# Altium PCB NBP-28 Pin_Swap_Example.PcbDoc (part 3 of 4)
Units mil, origin at the board's own origin, x right, y up, seen from the top; angles counter-clockwise.
Board outline 2716.54 x 3916.86 mil, 10 copper layers (Top Layer, Mid-Layer 1, VCC1V2, Mid-Layer 2, VCC, GND, MidLayer4, VCCINT, Mid-Layer 3, Bottom Layer), stack 81 mil thick; 230 components, 429 nets, 1587 pads, 770 vias.
Unrouted connection lines stored in the file: 563.
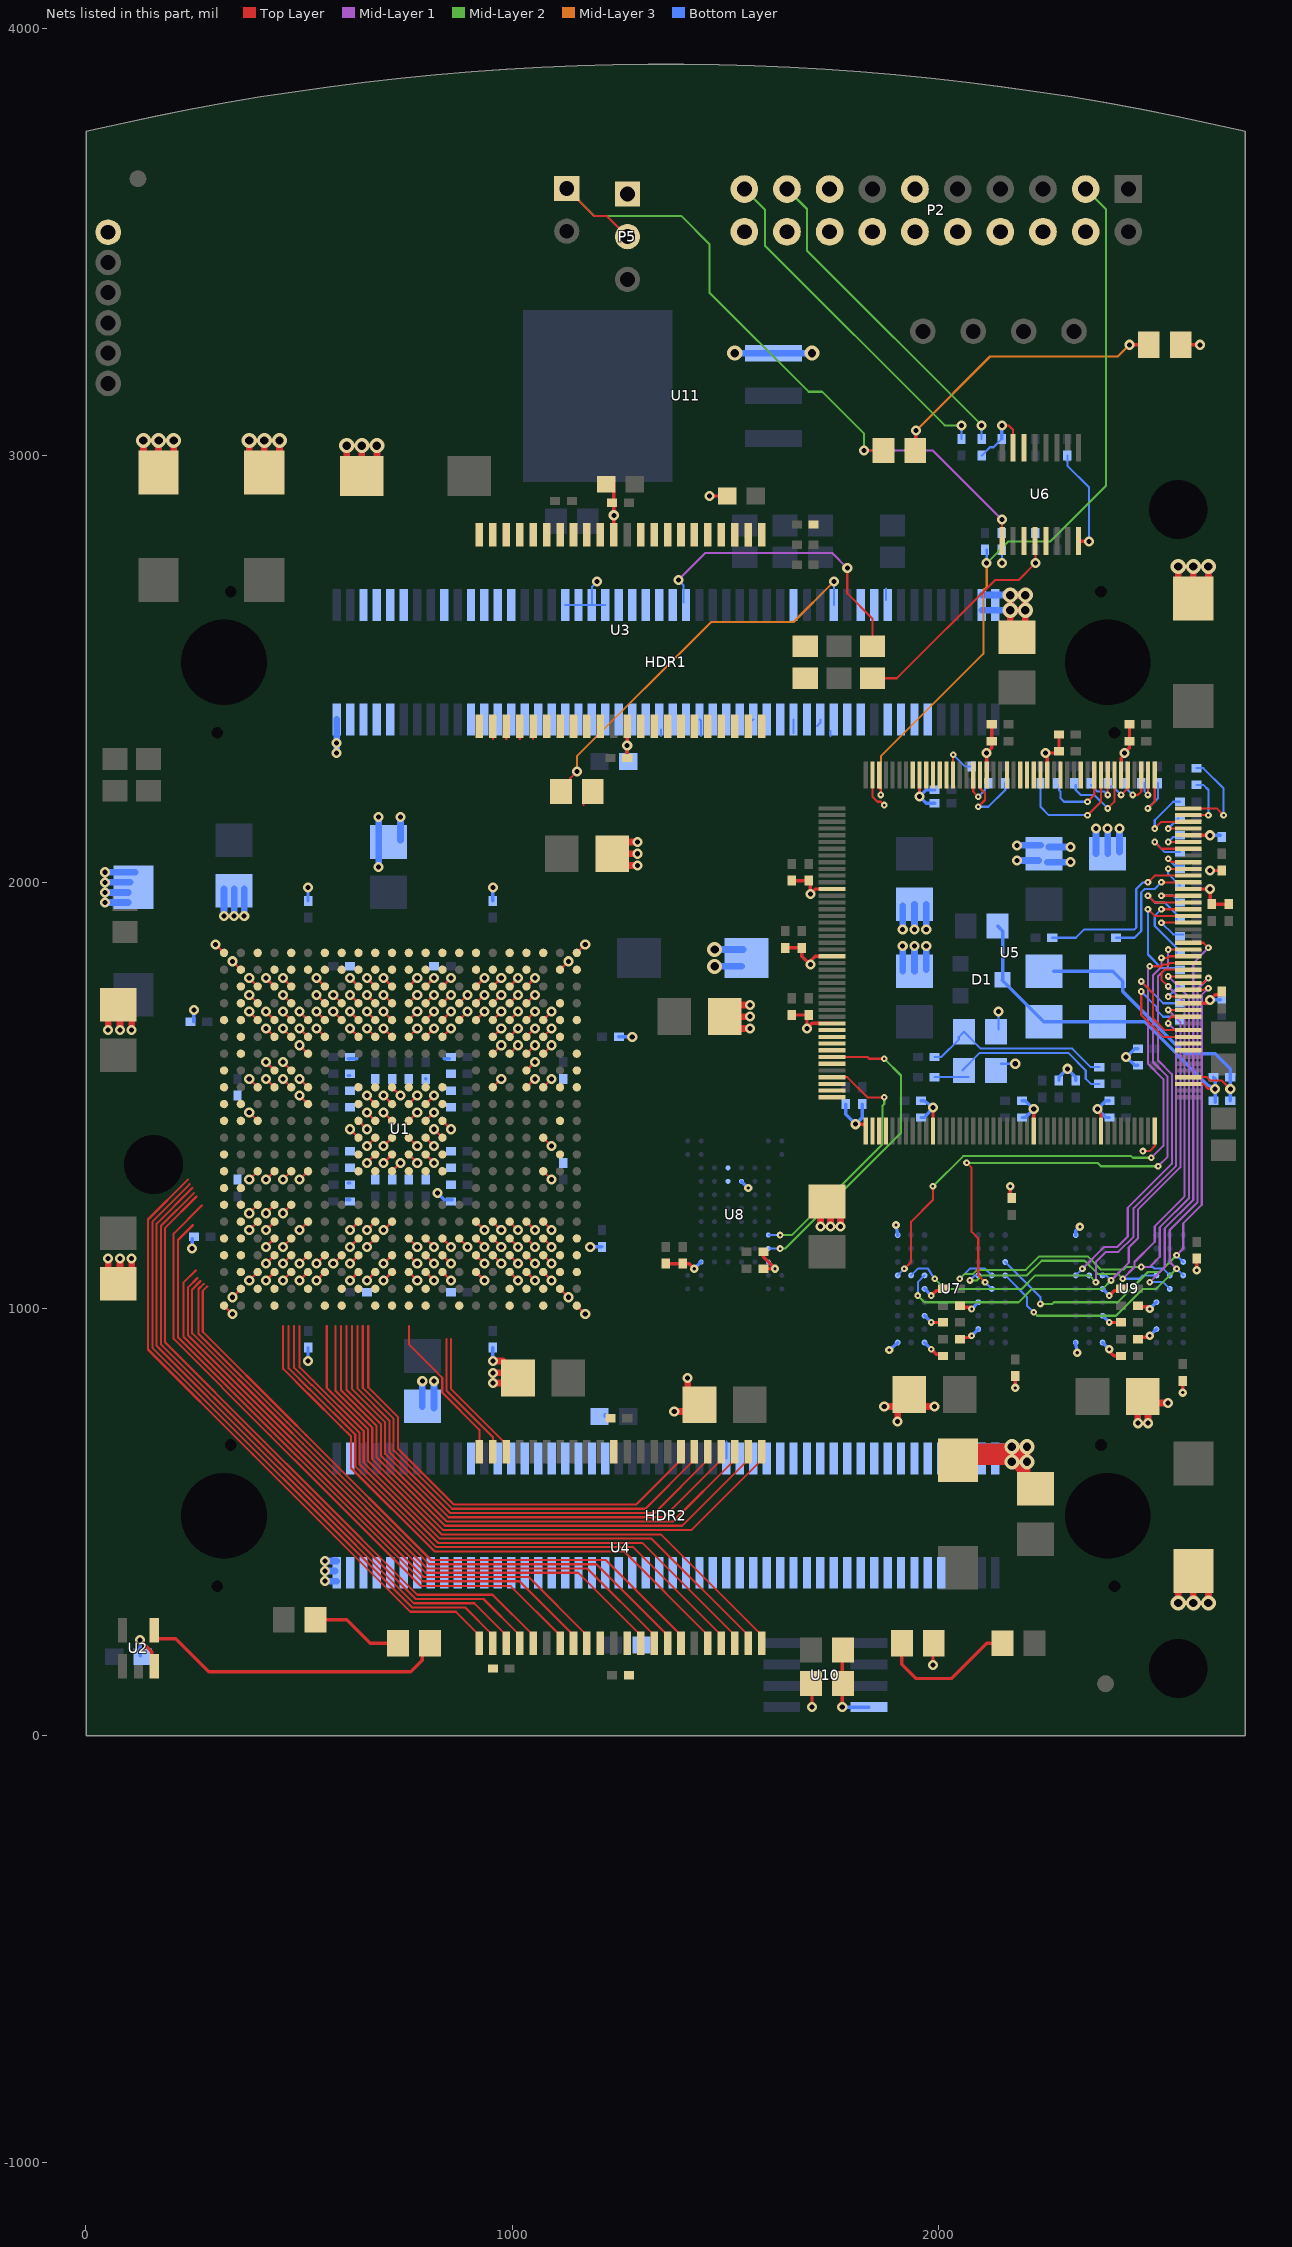
[diagram p9: the nets of this part, all layers, seen from the top]

## Via types
v1: diameter 23.62, hole 11.81, Top Layer to Bottom Layer, 495 vias
v2: diameter 78.74, hole 47.24, Top Layer to Bottom Layer, 101 vias
v3: diameter 15.75, hole 5.91, Top Layer to Bottom Layer, 92 vias
v4: diameter 35.43, hole 19.68, Top Layer to Bottom Layer, 59 vias
v5: diameter 19.68, hole 7.87, Top Layer to Bottom Layer, 23 vias

## Nets (pads, with @x,y where several pads share a name; then routed paths per layer and width w, separated by ;. In a path a pad name is that pad's centre, name@x,y a point inside that pad or via, vN(x,y) a via of type N, cw(c..) or ccw(c..) an arc to the next point about the centre after c; other vN are vias at no path point) (continued)
FPGA_TDO: HDR1.54 R6.2 | length 702.1
  Top Layer w5: v1(1785.15,2735.92) 1785.15,2676.87 1844.2,2617.81 R6.2@1844.2,2552.85
  Mid-Layer 1 w5: v1(1389.3,2708.31) 1452.34,2771.36 1749.71,2771.36 v1(1785.15,2735.92)
  Bottom Layer w5: v1(1389.3,2708.31) 1401.3,2696.31 HDR1.54@1401.3,2655.31
FPGA_TMS: HDR1.70 R13.1 U6.14
FPGA_TMSP: R13.2 U1.A20
GND: C1.1 C2.2 C3.2 C4.2 C5.2 C6.2 C7.2 C8.2 C9.2 C10.2 C11.2 C12.2 C13.2 C14.2 C15.2 C16.2 C17.2 C18.2 C19.2 C20.2 C21.2 C22.2 C23.2 C24.2 C25.2 C26.2 C27.2 C28.2 C29.2 C30.2 C31.2 C32.2 C33.2 C34.2 C35.2 C36.2 C37.2 C38.2 C39.2 C40.2 C41.2 C42.2 C43.2 C44.2 C45.2 C46.2 C47.2 C48.2 C49.2 C50.2 C51.2 C52.2 C53.2 C54.2 C55.2 C56.2 C57.2 C58.2 C62.2 C66.2 C67.2 C68.2 C69.2 C70.2 C71.2 C72.2 C73.2 C74.2 C75.2 C76.2 C77.2 C78.2 C79.2 C80.2 C81.2 C82.2 C83.2 C84.2 C85.2 C86.2 C87.2 C88.2 C89.2 C90.2 C91.2 C92.2 C93.2 C94.2 C95.2 C96.2 C97.2 C98.2 C99.2 C100.2 C101.2 C102.2 C103.2 C104.2 C105.2 C106.2 C107.2 C108.2 C109.2 C110.2 C111.2 C112.2 C113.2 C114.2 C115.2 C116.2 C117.2 C118.2 C119.2 C120.2 C121.2 C122.2 C123.2 C124.2 C125.2 C126.2 C127.2 C128.2 C129.2 C130.2 C131.2 C132.2 C133.2 HDR1.1 HDR1.36 HDR1.38 HDR1.40 HDR1.42 HDR1.98 HDR1.100 HDR2.1 HDR2.98 HDR2.100 LED1.2 LED3.2 P2.4 P2.6 P2.8 P2.10 P2.11 P2.12 P2.14 P2.16 P2.18 P2.20 P5.1 R37.1 R46.1 R60.2 R63.1 R65.2 R66.1 TP10.1 U1.A1 U1.A22 U1.AA2 U1.AA21 U1.AB1 U1.AB22 U1.B2 U1.B21 U1.C9 U1.C14 U1.J3 U1.J9 U1.J10 U1.J11 U1.J12 U1.J13 U1.J14 U1.J20 U1.K9 U1.K10 U1.K11 U1.K12 U1.K13 U1.K14 U1.L9 U1.L10 U1.L11 U1.L12 U1.L13 U1.L14 U1.M9 U1.M10 U1.M11 U1.M12 U1.M13 U1.M14 U1.N9 U1.N10 U1.N11 U1.N12 U1.N13 U1.N14 U1.P3 U1.P9 U1.P10 U1.P11 U1.P12 U1.P13 U1.P14 U1.P20 U1.Y9 U1.Y14 U2.3 U3.12 U3.34 U4.12 U4.34 U5.13 U5.23 U5.33 U5.45 U5.55 U5.70 U5.80 U5.88 U5.103 U5.120 U5.128 U5.138 U5.149 U5.158 U5.168 U5.175 U6.8 U6.15 U7.A1 U7.A3 U7.B7 U7.C3 U7.D7 U7.E3 U7.J1 U8.D4 U8.K2 U8.K7 U9.A1 U9.A3 U9.B7 U9.C3 U9.D7 U9.E3 U9.J1 U11.1 | length 11663.4
  Top Layer w5: v1(304.83,1854.04) U1.A1@324.52,1834.35 ; U1.AB1@324.52,1007.58 v1(344.2,987.89) ; v1(344.2,1027.26) U1.AA2@363.89,1046.95 ; v1(344.2,1814.67) U1.B2@363.89,1794.98 ; v1(383.57,1302.85) U1.P3@403.26,1322.54 ; v1(383.57,1539.08) U1.J3@403.26,1519.39 ; v1(619.79,1066.63) U1.Y9@639.48,1086.32 ; v1(619.79,1420.97) U1.M9@639.48,1401.28 ; v1(619.79,1775.3) U1.C9@639.48,1755.61 ; U1.L9@639.48,1440.65 v1(659.16,1420.96) ; v1(659.16,1342.22) U1.N10@678.85,1361.91 ; v1(659.16,1381.59) U1.M10@678.85,1401.28 ; v1(659.16,1460.34) U1.L10@678.85,1440.65 ; v1(659.16,1499.71) U1.K10@678.85,1480.02 ; v1(698.53,1342.22) U1.N11@718.22,1361.91 ; v1(698.53,1381.59) U1.M11@718.22,1401.28 ; v1(698.53,1460.34) U1.L11@718.22,1440.65 ; v1(698.53,1499.71) U1.K11@718.22,1480.02 ; U1.P11@718.22,1322.54 v1(737.9,1342.23) ; U1.J11@718.22,1519.39 v1(737.9,1499.7) ; U1.N12@757.59,1361.91 v1(777.27,1342.22) ; U1.M12@757.59,1401.28 v1(777.27,1381.59) ; U1.L12@757.59,1440.65 v1(777.27,1460.34) ; U1.K12@757.59,1480.02 v1(777.27,1499.71) ; U1.N13@796.96,1361.91 v1(816.64,1342.22) ; U1.M13@796.96,1401.28 v1(816.64,1381.59) ; U1.L13@796.96,1440.65 v1(816.64,1460.34) ; U1.K13@796.96,1480.02 v1(816.64,1499.71) ; v1(816.64,1420.97) U1.M14@836.33,1401.28 ; U1.Y14@836.33,1086.32 v1(856.01,1066.63) ; U1.L14@836.33,1440.65 v1(856.01,1420.96) ; U1.C14@836.33,1755.61 v1(856.01,1775.3) ; U1.P20@1072.55,1322.54 v1(1092.23,1302.85) ; U1.J20@1072.55,1519.39 v1(1092.23,1539.08) ; U1.AA21@1111.92,1046.95 v1(1131.6,1027.26) ; U1.B21@1111.92,1794.98 v1(1131.6,1814.67) ; U1.AB22@1151.29,1007.58 v1(1170.97,987.89) ; U1.A22@1151.29,1834.35 v1(1170.97,1854.04) ; U5.175@1844.2,2251.67 1844.2,2200.49 1856.01,2188.68 1863.89,2188.68 v3(1871.76,2180.81) ; v1(2147.35,3070.57) 2163.1,3070.57 2173.93,3059.74 U6.15@2173.93,3018.41 ; v3(2478.06,1369.78) 2493.81,1369.78 2505.62,1381.59 U5.88@2505.62,1417.03
  Top Layer w7.87: v1(127.67,224.11) 155.22,196.55 U2.3@155.22,165.06 ; U3.34@1237.9,2809.74 v1(1237.9,2859.94) 1237.9,2932.78 C51.2@1237.9,2940.65 ; C53.2@1269.4,2291.04 v1(1269.4,2320.57) U3.12@1269.4,2365.85 U3.12@1269.4,2370.77 ; C105.2@1359.95,1106 1415.07,1106 v5(1426.88,1094.19) ; v1(1462.31,2905.22) C124.2@1503.65,2905.22 ; C103.2@1588.3,1094.19 v5(1615.85,1094.19) 1588.3,1121.75 C106.2@1588.3,1133.56 ; C71.2@1639.48,1846.16 C81.2@1678.85,1846.16 1678.85,1826.48 v1(1698.53,1806.79) 1698.53,1814.67 1710.34,1826.48 U5.23@1749.71,1826.48 ; C70.2@1655.22,1688.68 C80.2@1694.59,1688.68 ; C68.2@1655.22,2003.64 C78.2@1694.59,2003.64 ; C80.2@1698.53,1684.74 1694.6,1684.74 1690.66,1684.74 v1(1690.66,1657.18) 1702.47,1669 U5.33@1749.71,1669 ; C78.2@1698.53,1999.7 v1(1698.53,1972.15) 1710.34,1983.96 U5.13@1749.71,1983.96 ; v1(1702.47,66.63) R65.2@1702.47,119.78 ; v1(1804.83,1432.78) U5.45@1828.45,1432.78 ; v1(1954.44,2200.49) U5.168@1954.44,2251.67 ; v3(1982,905.22) 1993.81,893.41 C120.2@2013.49,893.41 ; v3(1982,968.21) C118.2@2009.56,968.21 ; v3(1982,1031.2) 1993.81,1043.01 C109.2@2013.49,1043.01 ; v1(1985.93,165.06) LED1.2@1985.93,214.27 ; U5.55@1985.93,1417.03 v1(1985.93,1472.15) ; C119.2@2044.99,932.78 2072.55,932.78 v3(2076.48,936.71) ; C121.2@2044.99,1003.64 2072.55,1003.64 v3(2076.48,999.7) ; U5.158@2111.92,2251.67 v1(2111.92,2302.85) 2123.73,2314.67 C95.2@2123.73,2369.78 ; C122.2@2167.04,1263.48 v5(2167.04,1287.11) ; v5(2178.85,814.67) C108.2@2178.85,842.22 ; U5.70@2222.15,1417.03 v1(2222.15,1468.21) ; v1(2249.71,2302.85) C86.2@2277.27,2302.85 ; U5.149@2253.65,2251.67 v1@2253.65,2298.92 ; C86.2@2281.21,2306.79 C76.2@2281.21,2346.16 ; U6.8@2328.45,2798.92 v1(2352.08,2798.92) ; v1@2371.76,1464.27 2379.63,1456.4 U5.80@2379.63,1417.03 ; v5@2398.33,902.28 2410.14,890.47 C117.2@2429.82,890.47 ; v3(2399.32,968.21) C112.2@2426.88,968.21 ; v3(2399.32,1031.2) 2411.13,1043.01 C107.2@2430.82,1043.01 ; U5.138@2426.88,2251.67 2426.88,2291.04 v1@2434.75,2298.92 ; v1(2434.75,2302.85) 2446.56,2314.67 C94.2@2446.56,2369.78 ; C115.2@2461.32,933.78 2488.88,933.78 v5@2492.81,937.71 ; C116.2@2461.32,1004.64 2488.88,1004.64 v5@2492.82,1000.7 ; LED3.2@2566.64,3259.55 v1(2611.92,3259.55) ; v5(2571.56,803.85) C114.2@2571.56,831.41 ; U5.103@2584.36,1716.24 2627.67,1716.24 v1(2635.54,1724.11) 2647.35,1735.93 C84.2@2663.1,1735.93 ; U5.120@2584.36,1983.96 v1(2635.54,1983.96) C101.2@2635.54,1952.46 ; U5.128@2584.36,2109.94 v1(2635.54,2109.94) ; v5(2604.04,1090.26) C113.2@2604.04,1117.81 ; v1(2635.54,2027.26) C75.2@2663.1,2027.26 ; C101.2@2639.48,1948.52 C93.2@2678.85,1948.52
  Top Layer w15.75: C3.2@44.99,1054.82 52.86,1058.76 v1(52.86,1117.81) ; C32.2@44.99,1716.24 52.86,1712.3 v1(52.86,1653.25) ; C3.2@76.48,1054.82 80.42,1058.76 v1(80.42,1117.81) ; C32.2@76.48,1716.24 80.42,1712.3 v1(80.42,1653.25) ; C3.2@107.98,1054.82 v1(107.98,1117.81) ; v1(107.98,1653.25) C32.2@107.98,1716.24 ; C130.2@135.54,2964.27 v4(135.54,3035.14) ; C130.2@170.97,2960.33 v4(170.97,3035.14) ; C130.2@206.41,2956.4 v4(206.41,3035.14) ; C127.2@383.57,2972.15 v4(383.57,3035.14) ; C127.2@419,2960.33 v4(419,3035.14) ; C127.2@454.44,2976.08 v4(454.44,3035.14) ; C131.2@611.92,2952.46 v4(611.92,3023.33) ; C131.2@647.35,2952.46 v4(647.35,3023.33) ; C131.2@682.78,2952.46 v4(682.78,3023.33) ; v1(954.44,826.48) C2.2@1013.49,826.48 ; v1(954.44,850.1) C2.2@1017.43,850.1 ; v1(954.44,877.66) 978.06,877.66 C2.2@997.74,857.97 ; C49.2@1230.03,2039.07 v1(1293.02,2039.07) ; C49.2@1230.03,2094.19 v1(1293.02,2094.19) ; C49.2@1233.96,2066.63 v1(1293.02,2066.63) ; v1(1379.63,759.55) C50.2@1442.63,759.55 ; C50.2@1411.13,763.48 v1(1411.13,838.29) ; C31.2@1493.81,1657.18 v1(1556.8,1657.18) ; C31.2@1493.81,1712.3 v1(1556.8,1712.3) ; C31.2@1497.74,1684.74 v1(1556.8,1684.74) ; v1(1722.15,1192.62) C102.2@1722.15,1235.93 ; v1(1745.78,1192.62) C102.2@1745.78,1243.8 ; v1(1769.4,1192.62) C102.2@1769.4,1251.67 ; v1(1871.76,771.36) C110.2@1903.26,771.36 ; v1(1903.26,735.93) C110.2@1903.26,771.36 ; C110.2@1903.26,783.17 C110.2@1903.26,771.36 ; C110.2@1919,771.36 C110.2@1903.26,771.36 ; C110.2@1938.69,771.36 v1(1989.87,771.36) ; C132.2@2044.99,676.87 v4(2170.97,676.87) ; C132.2@2048.93,641.44 v4(2170.97,641.44) ; C132.2@2072.55,665.06 v4@2170.97,665.06 ; C132.2@2080.42,653.25 v4@2170.97,653.25 ; C123.2@2167.04,2566.63 v4(2167.04,2637.5) ; C123.2@2202.47,2566.63 v4(2202.47,2637.5) ; C125.2@2206.41,582.38 C125.2@2206.41,606 ; C125.2@2210.34,602.07 C125.2@2206.41,606 ; v1(2466.25,731.99) C111.2@2466.25,794.98 ; v1(2489.87,731.99) C111.2@2489.87,787.11 ; C111.2@2493.81,779.23 v1(2537.11,779.23) ; v4(2560.74,310.73) C126.2@2560.74,373.72 ; C133.2@2560.74,2676.87 v4(2560.74,2739.86) ; v4(2596.17,310.73) C126.2@2596.17,377.66 ; C133.2@2596.17,2665.06 v4(2596.17,2739.86) ; v4(2631.6,310.73) C126.2@2631.6,361.91 ; C133.2@2631.6,2661.12 v4(2631.6,2739.86) ; v4(2167.04,2637.5) v4(2202.47,2637.5) ; v4(2167.04,2637.5) v4(2167.04,2672.93) v4(2202.47,2672.93) v4(2202.47,2637.5) ; v4(2170.97,641.44) v4(2206.41,641.44) ; v4(2170.97,641.44) v4@2170.97,653.25 ; v4(2170.97,641.44) C125.2@2206.41,606 ; v4@2170.97,653.25 v4@2170.97,665.06 ; v4@2170.97,653.25 2194.59,653.25 v4(2206.41,641.44) ; v4@2170.97,665.06 v4(2170.97,676.87) ; v4@2170.97,665.06 2194.59,665.06 v4(2206.41,676.87) ; v4(2170.97,676.87) v4(2206.41,676.87) ; C125.2@2206.41,606 v4(2206.41,641.44) ; v4(2206.41,641.44) v4(2206.41,676.87)
  Bottom Layer w5: HDR1.36@1123.73,2649.31 HDR1.38@1155.22,2649.31 HDR1.40@1186.72,2649.31 ; v1(1198.53,2704.43) 1186.72,2692.62 HDR1.40@1186.72,2649.31 ; HDR1.42@1218.22,2649.31 HDR1.40@1186.72,2649.31 ; R66.1@2100.11,2999.7 2119.79,3019.39 2127.67,3019.39 C62.2@2147.35,3039.07 ; R37.1@2139.48,1655.22 v1(2139.48,1696.55) ; R46.1@2145.38,1574.51 v1(2178.85,1574.51) ; v1(2147.35,2747.74) R60.2@2147.35,2779.23 ; R63.1@2300.89,2999.7 2300.89,2976.08 2352.08,2924.9 v1(2352.08,2798.92)
  Bottom Layer w7.87: C1.1@127.67,186.71 v1(127.67,224.11) ; v1(249.71,1141.44) C11.2@249.71,1165.06 ; C9.2@253.65,1672.93 v1(253.65,1700.49) ; v1(521.37,877.66) C10.2@521.37,909.15 ; C4.2@521.37,1956.4 v1(521.37,1987.89) ; C24.2@611.92,1255.61 C24.2@619.79,1255.61 ; C20.2@615.85,1294.98 C20.2@619.79,1294.98 ; C21.2@615.85,1546.95 C21.2@619.79,1546.95 ; C22.2@615.85,1586.32 635.54,1586.32 ; v1(824.52,1271.36) 840.26,1255.61 C26.2@859.95,1255.61 ; 840.26,1586.32 C28.2@852.08,1586.32 ; v1(954.44,877.66) C5.2@954.44,909.15 ; C8.2@954.44,1956.4 v1(954.44,1987.89) ; v1(1182.78,1145.37) C7.2@1210.34,1145.37 ; C56.2@1218.22,747.74 C56.2@1218.22,751.67 ; C6.2@1249.71,1637.5 v1(1281.21,1637.5) ; C52.2@1269.4,2285.14 v1(1269.4,2320.57) ; v5(1426.88,1094.19) U8.K7@1442.63,1109.94 ; U8.D4@1537.11,1298.92 v5(1552.86,1283.17) ; U8.K2@1600.11,1109.94 v5(1615.85,1094.19) ; C97.2@1781.21,1480.02 1781.21,1456.4 v1(1804.83,1432.78) 1820.58,1448.52 C92.2@1820.58,1480.02 ; v5(1883.36,903.59) U7.A1@1903.26,920.96 ; v5(1899.32,1196.55) U7.J1@1903.26,1172.93 ; C79.2@1958.37,1448.52 1966.25,1448.52 v1(1985.93,1472.15) 1966.25,1487.89 C69.2@1958.37,1487.89 ; U7.A3@1966.25,920.96 v3(1982,905.22) ; U7.C3@1966.25,983.96 v3(1982,968.21) ; U7.E3@1966.25,1046.95 v3(1982,1031.2) ; C87.2@1989.87,2184.74 1970.19,2184.74 v1(1954.44,2200.49) 1970.19,2216.24 C77.2@1989.87,2216.24 ; v3(2076.48,936.71) U7.B7@2092.23,952.46 ; v3(2076.48,999.7) U7.D7@2092.23,1015.45 ; C62.2@2147.35,3039.07 v1(2147.35,3070.57) ; C83.2@2194.59,1448.52 2202.47,1448.52 v1(2222.15,1468.21) 2202.47,1487.89 C73.2@2194.59,1487.89 ; C98.2@2281.21,1535.14 2281.21,1543.01 v1(2300.89,1562.7) 2320.58,1543.01 C91.2@2320.58,1535.14 ; U9.A1@2319.59,921.96 2319.59,920.96 2319.63,920.77 v5(2324.52,897.34) ; U9.J1@2320.58,1172.93 2320.58,1182.78 v5(2330.42,1192.62) ; U9.A3@2383.57,920.96 v5(2399.32,905.22) ; U9.C3@2383.57,983.96 v3(2399.32,968.21) ; U9.E3@2383.57,1046.95 v3(2399.32,1031.2) ; C82.2@2399.32,1448.52 2391.45,1448.52 v1(2371.76,1468.21) 2391.45,1487.89 C72.2@2399.32,1487.89 ; C99.2@2466.25,1570.57 2458.37,1570.57 v1(2438.69,1590.26) 2458.37,1609.94 C90.2@2466.25,1609.94 ; v5(2493.81,936.71) U9.B7@2509.56,952.46 ; v5(2493.81,999.7) U9.D7@2509.56,1015.45 ; v1(2635.54,1724.11) C74.2@2659.16,1724.11 ; v1(2635.54,2109.94) C85.2@2659.16,2109.94
  Bottom Layer w15.75: v1(44.99,1952.46) C128.2@100.11,1952.46 ; v1(44.99,1976.08) C128.2@100.11,1976.08 ; v1(44.99,1999.7) C128.2@104.04,1999.7 ; v1(44.99,2023.33) C128.2@115.85,2023.33 ; v1(324.52,1920.96) C30.2@324.52,1983.96 ; v1(348.14,1920.96) C30.2@348.14,1980.02 C30.2@348.14,1983.96 ; v1(371.76,1920.96) C30.2@371.76,1983.96 ; v1(560.74,361.91) HDR2.1@588.3,361.91 ; v1(560.74,385.53) HDR2.1@584.36,385.53 ; v1(560.74,409.15) HDR2.1@588.3,409.15 ; v1(588.3,2302.85) v1(588.3,2326.48) HDR1.1@588.29,2381.59 ; v1(686.72,2035.14) v1(686.72,2153.25) ; C17.2@737.9,2098.13 v1(737.9,2153.25) ; C16.2@789.08,771.36 v1(789.08,830.41) ; C16.2@816.64,767.42 v1(816.64,830.41) ; v4(1474.12,1802.85) C129.2@1537.11,1802.85 ; v4(1474.12,1842.22) C129.2@1541.05,1842.22 ; v4(1521.37,3239.86) U11.1@1611.92,3239.86 v4(1702.47,3239.86) ; C88.2@1915.07,1791.04 v1(1915.07,1850.1) ; v1(1915.07,1889.47) C67.2@1915.07,1944.59 ; C88.2@1942.63,1791.04 v1(1942.63,1850.1) ; v1(1942.63,1889.47) C67.2@1942.63,1948.52 ; C88.2@1970.19,1794.98 v1(1970.19,1850.1) ; v1(1970.19,1889.47) C67.2@1970.19,1948.52 ; HDR2.98@2100.11,641.44 v4(2170.97,641.44) v4(2206.41,641.44) ; HDR2.98@2100.11,676.87 2131.6,676.87 v4(2170.97,676.87) v4(2206.41,676.87) ; HDR1.98@2100.11,2637.5 v4(2167.04,2637.5) ; HDR1.98@2100.11,2672.93 v4(2167.04,2672.93) ; v1(2182.78,2050.89) C89.2@2233.96,2050.89 ; v1(2182.78,2086.32) C89.2@2237.9,2086.32 ; C89.2@2253.65,2046.95 v1(2308.77,2046.95) ; C89.2@2257.59,2082.38 v1(2308.77,2082.38) ; C66.2@2367.82,2066.63 v1(2367.82,2125.69) ; C66.2@2395.38,2066.63 v1(2395.38,2125.69) ; C66.2@2422.94,2070.57 v1(2422.94,2125.69) ; v4(2167.04,2637.5) v4(2202.47,2637.5) v4(2202.47,2672.93) v4(2167.04,2672.93) ; v4(2167.04,2637.5) v4(2167.04,2672.93)
GREEN0: HDR1.10 U1.A3
GREEN1: HDR1.12 U1.D3 | length 27.8
  Top Layer w5: v1(383.57,1735.93) U1.D3@403.26,1716.24
HDRIVE: HDR1.18 U1.B4
INT0: U1.F19 U5.155 | length 27.8
  Top Layer w5: U1.F19@1033.18,1637.5 v1(1052.86,1657.19)
INT1: U1.E21 U5.153
INT2: U1.F20 U5.152 | length 27.8
  Top Layer w5: U1.F20@1072.55,1637.5 v1(1092.23,1657.19)
INT3: U1.E22 U5.151
INT4: U1.F21 U5.150
IO0: HDR2.7 U1.W2
IO1: HDR2.9 U1.AB4
IO2: HDR2.11 U1.T3 | length 27.8
  Top Layer w5: v1(383.57,1224.11) U1.T3@403.26,1243.8
IO3: HDR2.13 U1.Y5 | length 27.8
  Top Layer w5: v1(462.31,1066.63) U1.Y5@482,1086.32
IO4: HDR2.15 U1.W4 | length 27.8
  Top Layer w5: v1(422.94,1106) U1.W4@442.63,1125.69
IO5: HDR2.17 U1.V5 | length 27.8
  Top Layer w5: v1(462.31,1145.37) U1.V5@482,1165.06
IO6: HDR2.19 U1.T4 | length 27.8
  Top Layer w5: v1(422.94,1224.11) U1.T4@442.63,1243.8
IO7: HDR2.21 U1.V4 | length 27.8
  Top Layer w5: v1(422.94,1145.37) U1.V4@442.63,1165.06
IO8: HDR2.23 U1.Y6 | length 27.8
  Top Layer w5: v1(501.68,1066.63) U1.Y6@521.37,1086.32
IO9: HDR2.25 U1.Y7 | length 27.8
  Top Layer w5: v1(541.05,1066.63) U1.Y7@560.74,1086.32
IO10: HDR2.27 U1.P5 | length 27.8
  Top Layer w5: v1(462.31,1302.85) U1.P5@482,1322.54
IO11: HDR2.29 U1.W7 | length 27.8
  Top Layer w5: v1(541.05,1106) U1.W7@560.74,1125.69
IO12: HDR2.31 U1.U6 | length 27.8
  Top Layer w5: v1(501.68,1184.74) U1.U6@521.37,1204.43
IO13: HDR2.33 U1.AA8
IO14: HDR2.35 U1.W8 | length 27.8
  Top Layer w5: v1(580.42,1106) U1.W8@600.11,1125.69
IO15: HDR2.37 U1.AB11
IO16: HDR2.39 U1.AB10
IO17: HDR2.41 U1.Y11 | length 27.8
  Top Layer w5: v1(698.53,1066.63) U1.Y11@718.22,1086.32
IO18: HDR2.43 U1.U9 | length 27.8
  Top Layer w5: v1(619.79,1184.74) U1.U9@639.48,1204.43
IO19: HDR2.45 U1.P6 | length 27.8
  Top Layer w5: v1(501.68,1302.85) U1.P6@521.37,1322.54
IO20: HDR2.47 U1.W11 | length 27.8
  Top Layer w5: v1(698.53,1106) U1.W11@718.22,1125.69
IO21: HDR2.49 U1.U10 | length 27.8
  Top Layer w5: v1(659.16,1184.74) U1.U10@678.85,1204.43
IO22: HDR2.51 U1.Y12 | length 27.8
  Top Layer w5: U1.Y12@757.59,1086.32 v1(777.27,1066.63)
IO23: HDR2.53 U1.W12 | length 27.8
  Top Layer w5: U1.W12@757.59,1125.69 v1(777.27,1106)
IO24: HDR2.55 U1.Y13 | length 27.8
  Top Layer w5: U1.Y13@796.96,1086.32 v1(816.64,1066.63)
IO25: HDR2.57 U1.AB15
IO26: HDR2.59 U1.W13 | length 27.8
  Top Layer w5: U1.W13@796.96,1125.69 v1(816.64,1106)
IO27: HDR2.61 U1.V13 | length 27.8
  Top Layer w5: U1.V13@796.96,1165.06 v1(816.64,1145.37)
IO28: HDR2.63 U1.W14 | length 27.8
  Top Layer w5: U1.W14@836.33,1125.69 v1(856.01,1106)
IO29: HDR2.65 U1.Y16 | length 27.8
  Top Layer w5: U1.Y16@915.07,1086.32 v1(934.75,1066.63)
IO30: HDR2.67 U1.AB18
IO31: HDR2.69 U1.W16 | length 27.8
  Top Layer w5: U1.W16@915.07,1125.69 v1(934.75,1106)
IO32: HDR2.71 U1.V14 | length 27.8
  Top Layer w5: U1.V14@836.33,1165.06 v1(856.01,1145.37)
IO33: HDR2.73 U1.AA18
IO34: HDR2.75 U1.V15 | length 27.8
  Top Layer w5: U1.V15@875.7,1165.06 v1(895.38,1145.37)
IO35: HDR2.77 U1.AB20
JIOA0: HDR1.3 U1.C3 | length 27.8
  Top Layer w5: v1(383.57,1775.3) U1.C3@403.26,1755.61
JIOA1: HDR1.5 U1.E3 | length 27.8
  Top Layer w5: v1(383.57,1696.56) U1.E3@403.26,1676.87
JIOA2: HDR1.7 U1.E2
JIOA3: HDR1.9 U1.C4 | length 27.8
  Top Layer w5: v1(422.94,1775.3) U1.C4@442.63,1755.61
JIOB0: HDR1.83 U1.G19 | length 27.8
  Top Layer w5: U1.G19@1033.18,1598.13 v1(1052.86,1617.82)
JIOB1: HDR1.85 U1.J17 | length 27.8
  Top Layer w5: U1.J17@954.44,1519.39 v1(974.12,1539.08)
JIOB2: HDR1.87 U1.G20 | length 27.8
  Top Layer w5: U1.G20@1072.55,1598.13 v1(1092.23,1617.82)
JIOB3: HDR1.89 U1.H19 | length 27.8
  Top Layer w5: U1.H19@1033.18,1558.76 v1(1052.86,1578.45)
KBCLOCK: HDR1.22 U1.C5 | length 27.8
  Top Layer w5: v1(462.31,1775.3) U1.C5@482,1755.61
KBDATA: HDR1.24 U1.E4 | length 27.8
  Top Layer w5: v1(422.94,1696.56) U1.E4@442.63,1676.87
LCD_BCKL: HDR2.22 U1.P4 | length 27.8
  Top Layer w5: v1(422.94,1302.85) U1.P4@442.63,1322.54
LCD_E: HDR2.26 U1.AA9
LED0: HDR2.60 U1.AA20 | length 39.4
  Bottom Layer w5: HDR2.60@1501.68,649.31 1501.68,688.68
LED1: HDR2.62 U1.W17 | length 27.8
  Top Layer w5: U1.W17@954.44,1125.69 v1(974.12,1106)
LED2: HDR2.64 U1.Y19 | length 27.8
  Top Layer w5: U1.Y19@1033.18,1086.32 v1(1052.86,1066.63)
LED3: HDR2.66 U1.V17 | length 27.8
  Top Layer w5: U1.V17@954.44,1165.06 v1(974.12,1145.37)
LED4: HDR2.68 U1.W19 | length 27.8
  Top Layer w5: U1.W19@1033.18,1125.69 v1(1052.86,1106)
LED5: HDR2.70 U1.Y21
LED6: HDR2.72 U1.W20 | length 27.8
  Top Layer w5: U1.W20@1072.55,1125.69 v1(1092.23,1106)
LED7: HDR2.74 U1.V19 | length 27.8
  Top Layer w5: U1.V19@1033.18,1165.06 v1(1052.86,1145.37)
MOUSECLOCK: HDR1.26 U1.D5 | length 27.8
  Top Layer w5: v1(462.31,1735.93) U1.D5@482,1716.24
MOUSEDATA: HDR1.28 U1.F4 | length 27.8
  Top Layer w5: v1(422.94,1657.19) U1.F4@442.63,1637.5
NBLE0: U1.J19 U5.37 | length 27.8
  Top Layer w5: U1.J19@1033.18,1519.39 v1(1052.86,1539.08)
NBLE1: U1.J5 U5.36 | length 27.8
  Top Layer w5: v1(462.31,1539.08) U1.J5@482,1519.39
NBLE2: U1.G2 U5.35
NBLE3: U1.H22 U5.34
NCS0: U1.L21 U5.48
NCS1: U1.L3 U5.47 | length 27.8
  Top Layer w5: v1(383.57,1460.34) U1.L3@403.26,1440.65
NCS2: U1.L2 U5.46
NCS3: U1.K6 U5.44 | length 27.8
  Top Layer w5: v1(501.68,1499.71) U1.K6@521.37,1480.02
NCS4: U1.J22 U5.43
NCS5: U1.J21 U5.42
NDACK0: U1.G18 U5.147 | length 27.8
  Top Layer w5: U1.G18@993.81,1598.13 v1(1013.49,1617.82)
NetC59_1: C59.1 R36.1 R37.2 | length 448
  Bottom Layer w5: R36.1@1989.87,1590.26 2005.62,1590.26 2046.39,1631.03 2046.39,1636.93 R37.2@2058.77,1649.31 2098.14,1609.94 2312.71,1609.94 2356.01,1566.63 C59.1@2375.7,1566.63
NetC60_1: C60.1 R44.1 R46.2 | length 458.3
  Bottom Layer w5: R44.1@1989.87,1543.01 R46.2@2068.61,1543.01 ; R46.2@2054.83,1558.76 2096.01,1599.94 2303.02,1599.94 2344.2,1558.76 2344.2,1539.07 2356.01,1527.26 C60.1@2375.7,1527.26
NetC61_1: C61.1 C63.1 C64.1 C65.1 D1.3 R59.2 U5.91 | length 864.6
  Top Layer w5: U5.91@2584.36,1527.26 2619.79,1527.26 2631.6,1515.45 v1(2647.35,1515.45)
  Bottom Layer w7.87: R59.2@2137.51,1897.34 2149.32,1885.53 D1.3@2149.32,1771.36 D1.3@2149.32,1769.39 ; D1.3@2148.33,1770.37 D1.3@2149.32,1769.39 ; C61.1@2643.41,1543.01 2647.35,1539.07 v1(2647.35,1515.45) ; C63.1@2647.35,1483.96 v1(2647.35,1515.45) ; D1.3@2149.32,1769.39 C65.1@2245.78,1672.93 C64.1@2395.38,1672.93 2482,1672.93 2631.6,1523.33 v1(2647.35,1515.45)
NetC61_2: C61.2 C63.2 C64.2 C65.2 U5.92 | length 706.5
  Top Layer w5: U5.92@2584.36,1543.01 2627.67,1543.01 2635.54,1535.14 2663.1,1535.14 v1(2682.78,1515.45)
  Bottom Layer w7.87: C65.2@2269.4,1791.04 C64.2@2395.38,1791.04 2407.19,1791.04 2430.82,1767.42 2430.82,1743.8 2576.48,1598.13 2647.35,1598.13 2682.78,1562.7 v1(2682.78,1515.45) C63.2@2682.78,1487.89
NetLED1_1: LED1.1 R5.2 | length 333.5
  Top Layer w7.87: LED1.1@1913.1,216.24 1913.1,167.03 1946.56,133.56 2029.24,133.56 2111.92,216.24 R5.2@2149.32,216.24
NetLED2_1: LED2.1 R16.1 | length 215.7
  Top Layer w7.87: R16.1@539.08,271.36 611.92,271.36 667.04,216.24 LED2.1@732,216.24
NetLED2_2: LED2.2 U2.4 | length 703.1
  Top Layer w7.87: U2.4@161.13,227.07 211.33,227.07 289.08,149.31 761.52,149.31 789.08,176.87 LED2.2@789.08,208.37
NetLED3_1: LED3.1 R58.2 | length 681.6
  Top Layer w7.87: R58.2@1938.69,3011.52 R58.2@1944.59,3011.52 v1(1946.56,3058.76) ; v1(2446.56,3259.55) LED3.1@2491.84,3259.55
  Mid-Layer 3 w5: v1(1946.56,3058.76) 2119.79,3231.99 2419,3231.99 v1(2446.56,3259.55)
NetP1_1: P1.1 P5.2 R58.1 R60.1 U6.1 | length 1745.1
  Top Layer w5: P1.1@1127.67,3625.69 1192.28,3561.07 1221.85,3561.07 P5.2@1270.02,3512.91 ; v1(1824.52,3011.52) 1867.82,3011.52 R58.1@1868.81,3010.53 ; U6.1@2147.35,2800.89 v1(2147.35,2850.1)
  Mid-Layer 1 w5: v1(1824.52,3011.52) 1985.93,3011.52 v1(2147.35,2850.1)
  Mid-Layer 2 w5: P1.1@1127.67,3625.69 1191.61,3561.74 1395.97,3561.74 1461.9,3495.82 1461.9,3382.01 1694.59,3149.31 1726.09,3149.31 1824.52,3050.89 v1(1824.52,3011.52)
  Bottom Layer w5: R60.1@2147.35,2818.6 v1(2147.35,2850.1)
NetP2_17: P2.17 R66.2 | length 774.4
  Mid-Layer 2 w5: P2.17@1643.81,3624.51 1690.66,3577.66 1690.66,3480.02 v1(2100.11,3070.57)
  Bottom Layer w5: R66.2@2100.11,3039.07 v1(2100.11,3070.57)
NetP2_19: P2.19 R67.2 | length 819.4
  Mid-Layer 2 w5: P2.19@1543.81,3624.51 1592.23,3576.08 1592.23,3491.83 2013.49,3070.57 v1(2052.86,3070.57)
  Bottom Layer w5: R67.2@2052.86,3039.07 v1(2052.86,3070.57)
NetR21_1: R21.1 U5.104 | length 84.6
  Top Layer w5: v3(2537.11,1731.99) U5.104@2584.36,1731.99
  Bottom Layer w5: v3(2537.11,1731.99) 2560.74,1755.61 R21.1@2564.67,1755.61
NetR22_1: R22.1 U5.99 | length 303.9
  Top Layer w5: v3(2474.12,1767.42) 2501.68,1739.86 2501.68,1680.81 2529.24,1653.25 U5.99@2584.36,1653.25
  Bottom Layer w5: v3(2474.12,1767.42) 2525.3,1716.24 R22.1@2564.67,1716.24
NetR23_1: R23.1 U5.98 | length 310.1
  Top Layer w5: v3(2474.12,1743.8) 2474.12,1688.68 2525.3,1637.5 U5.98@2584.36,1637.5
  Bottom Layer w5: v3(2474.12,1743.8) 2509.56,1708.37 2509.56,1700.49 2525.3,1684.74 R23.1@2568.61,1684.74
NetR25_1: R25.1 U5.127 | length 83.6
  Top Layer w5: v3(2537.11,2094.19) U5.127@2584.36,2094.19
  Bottom Layer w5: v3(2537.11,2094.19) 2548.93,2106 R25.1@2568.61,2106
NetR26_1: R26.1 U5.126 | length 154.1
  Top Layer w5: v3(2505.62,2094.19) 2521.37,2078.44 U5.126@2584.36,2078.44
  Bottom Layer w5: v3(2505.62,2094.19) 2529.24,2070.57 R26.1@2564.67,2070.57
NetR27_1: R27.1 U5.124 | length 92.5
  Top Layer w5: v3(2537.11,2054.82) 2544.99,2046.95 U5.124@2584.36,2046.95
  Bottom Layer w5: v3(2537.11,2054.82) 2552.86,2039.07 R27.1@2572.55,2039.07
NetR28_1: R28.1 U5.123 | length 98
  Top Layer w5: v3(2537.11,2031.2) U5.123@2584.36,2031.2
  Bottom Layer w5: v3(2537.11,2031.2) 2537.11,2019.39 R28.1@2564.67,1991.83
NetR29_1: R29.1 U5.122 | length 432.3
  Top Layer w5: v3(2489.87,1999.7) 2505.62,2015.45 U5.122@2584.36,2015.45
  Bottom Layer w5: R29.1@2265.46,1869.78 2320.58,1869.78 2340.26,1889.47 2458.37,1889.47 2462.31,1893.41 2462.31,1983.96 2478.06,1999.7 v3(2489.87,1999.7)
NetR30_1: R30.1 U5.121 | length 276.1
  Top Layer w5: v3(2521.37,1999.7) U5.121@2584.36,1999.7
  Bottom Layer w5: R30.1@2415.07,1869.78 2458.37,1869.78 2474.12,1885.53 2474.12,1976.08 2482,1983.96 2505.62,1983.96 v3(2521.37,1999.7)
NetR31_1: R31.1 U5.119 | length 112.8
  Top Layer w5: v3(2521.37,1968.21) U5.119@2584.36,1968.21
  Bottom Layer w5: v3(2521.37,1968.21) 2548.93,1968.21 R31.1@2564.67,1952.46
NetR32_1: R32.1 U5.118 | length 197.7
  Top Layer w5: v3(2489.87,1968.21) 2505.62,1952.46 U5.118@2584.36,1952.46
  Bottom Layer w5: v3(2489.87,1968.21) 2505.62,1952.46 2529.24,1952.46 2556.8,1924.9 R32.1@2556.8,1913.09
NetR33_1: R33.1 U5.117 | length 193.1
  Top Layer w5: v3(2521.37,1936.71) U5.117@2584.36,1936.71
  Bottom Layer w5: v3(2521.37,1936.71) 2505.62,1920.96 2505.62,1897.34 2556.8,1846.16 R33.1@2556.8,1834.35
NetR34_1: R34.1 U5.116 | length 299.1
  Top Layer w5: v3(2489.87,1936.71) 2505.62,1920.96 U5.116@2584.36,1920.96
  Bottom Layer w5: v3(2489.87,1936.71) 2489.87,1830.41 2521.37,1798.92 R34.1@2568.61,1798.92
NetR35_1: R35.1 U5.115 | length 125.6
  Top Layer w5: v3(2521.37,1905.22) U5.115@2584.36,1905.22
  Bottom Layer w5: v3(2521.37,1905.22) 2548.93,1877.66 R35.1@2572.55,1877.66
NetR39_1: R39.1 U5.129 | length 80.6
  Top Layer w5: v3(2537.11,2125.69) U5.129@2584.36,2125.69
  Bottom Layer w5: v3(2537.11,2125.69) R39.1@2560.74,2149.31
NetR40_1: R40.1 U5.131 | length 138.8
  Top Layer w5: U5.131@2584.36,2157.18 v3(2631.6,2157.18)
  Bottom Layer w5: R40.1@2604.04,2228.05 2619.79,2228.05 2631.6,2216.24 v3(2631.6,2157.18)
NetR41_1: R41.1 U5.133 | length 154.1
  Top Layer w5: v3(2489.87,2172.93) 2505.62,2188.68 U5.133@2505.62,2251.67
  Bottom Layer w5: v3(2489.87,2172.93) 2513.49,2196.56 R41.1@2513.49,2231.99
NetR42_1: R42.1 U5.134 | length 78.1
  Top Layer w5: v3(2489.87,2204.43) U5.134@2489.87,2251.67
  Bottom Layer w5: R42.1@2482,2231.99 2482,2212.3 v3(2489.87,2204.43)
NetR43_1: R43.1 U5.135 | length 98.7
  Top Layer w5: v3(2454.44,2204.43) 2466.25,2204.43 2474.12,2212.3 U5.135@2474.12,2251.67
  Bottom Layer w5: R43.1@2442.63,2235.92 2442.63,2216.24 v3(2454.44,2204.43)
NetR45_1: R45.1 U5.137 | length 93.4
  Top Layer w5: v3(2426.88,2204.43) 2442.63,2220.18 U5.137@2442.63,2251.67
  Bottom Layer w5: R45.1@2395.38,2224.11 2407.19,2224.11 v3(2426.88,2204.43)
NetR48_1: R48.1 U5.130 | length 181.9
  Top Layer w5: v3(2505.62,2125.69) 2521.37,2141.44 U5.130@2584.36,2141.44
  Bottom Layer w5: v3(2505.62,2125.69) 2505.62,2145.37 2548.93,2188.68 R48.1@2564.67,2188.68
NetR49_1: R49.1 U5.132 | length 234.8
  Top Layer w5: U5.132@2584.36,2172.93 2651.29,2172.93 v3(2667.04,2157.18)
  Bottom Layer w5: R49.1@2604.04,2267.42 2619.79,2267.42 2667.04,2220.18 v3(2667.04,2157.18)
NetR50_1: R50.1 U5.139 | length 189.8
  Top Layer w5: v3(2395.38,2172.93) 2411.13,2188.68 U5.139@2411.13,2251.67
  Bottom Layer w5: R50.1@2320.58,2228.05 2320.58,2216.24 2332.39,2204.43 2363.89,2204.43 v3(2395.38,2172.93)
NetR51_1: R51.1 U5.140 | length 96.4
  Top Layer w5: v3(2395.38,2204.43) U5.140@2395.38,2251.67
  Bottom Layer w5: R51.1@2356.01,2228.05 2371.39,2212.68 2387.13,2212.68 v3(2395.38,2204.43)
NetR52_1: R52.1 U5.141 | length 281
  Top Layer w5: v3(2348.14,2157.18) 2379.63,2188.68 U5.141@2379.63,2251.67
  Bottom Layer w5: R52.1@2237.9,2231.99 2237.9,2176.87 2257.59,2157.18 v3(2348.14,2157.18)
NetR53_1: R53.1 U5.142 | length 168.9
  Top Layer w5: v3(2348.14,2188.68) 2363.89,2204.43 U5.142@2363.89,2251.67
  Bottom Layer w5: R53.1@2281.21,2228.05 2281.21,2216.24 2285.15,2212.3 2285.15,2196.55 2293.02,2188.68 v3(2348.14,2188.68)
NetR54_1: R54.1 U5.159 | length 181.3
  Top Layer w5: v3(2092.23,2176.87) 2107.98,2192.62 2107.98,2208.37 2096.17,2220.18 U5.159@2096.17,2251.67
  Bottom Layer w5: v3(2092.23,2176.87) 2115.85,2176.87 2155.22,2216.24 R54.1@2155.22,2231.99
NetR55_1: R55.1 U5.160 | length 90.2
  Top Layer w5: U5.160@2080.42,2251.67 2080.42,2212.3 v3(2092.23,2200.49)
  Bottom Layer w5: v3(2092.23,2200.49) 2107.98,2216.24 R55.1@2107.98,2228.05
NetR56_1: R56.1 U5.163 | length 102
  Top Layer w5: U5.163@2033.18,2251.67 v3(2033.18,2298.92)
  Bottom Layer w5: v3(2033.18,2298.92) 2060.74,2271.36 R56.1@2076.48,2271.36
NetR64_2: R64.2 R65.1 U10.4 | length 197.5
  Top Layer w7.87: v1(1773.33,66.63) 1773.33,198.52 R64.2@1775.3,200.49
  Bottom Layer w7.87: v1(1773.33,66.63) U10.4@1836.13,66.63
NEXUS_TCK: HDR1.82 U1.D16 | length 27.8
  Top Layer w5: U1.D16@915.07,1716.24 v1(934.75,1735.93)
NEXUS_TDI: HDR1.84 U1.C19 | length 55.4
  Top Layer w5: U1.C19@1033.18,1755.61 v1(1052.86,1775.3)
  Bottom Layer w5: HDR1.84@1875.7,2661.12 1875.7,2688.68
NEXUS_TDO: HDR1.76 R2.1 | length 896.6
  Top Layer w5: R2.1@1135.54,2231.99 1135.54,2243.8 v1(1151.29,2259.55)
  Mid-Layer 3 w5: v1(1151.29,2259.55) 1151.29,2294.98 1466.25,2609.94 1659.16,2609.94 v1(1753.65,2704.43)
  Bottom Layer w5: HDR1.76@1753.65,2649.31 v1(1753.65,2704.43)
NEXUS_TDO_R: R2.2 U1.E12 | length 43.6
  Top Layer w5: U1.E12@757.59,1676.87 v1(777.27,1696.56) ; 1167.04,2180.81 R2.2@1167.04,2196.55
NEXUS_TMS: HDR1.80 U1.F13 | length 27.8
  Top Layer w5: U1.F13@796.96,1637.5 v1(816.64,1657.19)
NFLASH_CS: U5.41 U8.H2 | length 609.3
  Top Layer w5: U5.41@1749.71,1543.01 1785.15,1543.01 1832.39,1495.77 v3(1871.76,1495.77)
  Mid-Layer 2 w5: v3(1627.67,1172.93) 1655.22,1172.93 1867.82,1385.53 1867.82,1476.08 1871.76,1480.02 v3(1871.76,1495.77)
  Bottom Layer w5: U8.H2@1600.11,1172.93 v3(1627.67,1172.93)
NOE: U1.U16 U5.38 U8.J2 | length 764.6
  Top Layer w5: U1.U16@915.07,1204.43 v1(934.75,1184.74) ; U5.38@1749.71,1590.26 1832.39,1590.26 1836.33,1586.32 v3(1871.76,1586.32)
  Mid-Layer 2 w5: v3(1627.67,1141.44) 1639.48,1141.44 1911.13,1413.09 1911.13,1546.95 v3(1871.76,1586.32)
  Bottom Layer w5: U8.J2@1600.11,1141.44 v3(1627.67,1141.44)
NRESETOUT: U1.N21 U5.97 U8.D5
NSDRAM_CAS: U5.108 U7.F7 U9.F7 | length 1367
  Top Layer w5: v3(2537.11,1755.61) 2521.37,1771.36 2521.37,1787.11 2529.24,1794.98 U5.108@2584.36,1794.98
  Mid-Layer 1 w5: v3(2430.82,1070.57) 2458.37,1098.13 2458.37,1109.94 2505.62,1157.18 2505.62,1193.34 2575.85,1263.58 2575.85,1716.87 v3(2537.11,1755.61)
  Mid-Layer 2 w5: v3(2072.55,1066.63) 2088.3,1066.63 2100.11,1078.44 2206.41,1078.44 2240.89,1112.93 2341.21,1112.93 2372.08,1082.07 2419.32,1082.07 v3(2430.82,1070.57)
  Bottom Layer w5: v3(2072.55,1066.63) 2084.36,1078.44 U7.F7@2092.23,1078.44 ; v3(2430.82,1070.57) 2470.19,1070.57 2478.06,1078.44 U9.F7@2509.56,1078.44
NSDRAM_CS: U5.105 U7.G9 U9.G9 | length 1227
  Top Layer w5: U5.105@2584.36,1747.74 2619.79,1747.74 2623.73,1751.67 v3(2631.6,1751.67)
  Mid-Layer 1 w5: v3(2556.8,1125.69) 2572.55,1141.44 2572.55,1200.49 2615.85,1243.8 2615.85,1735.93 v3(2631.6,1751.67)
  Mid-Layer 2 w5: v3(2237.9,1011.52) 2265.46,1011.52 2269.4,1015.45 2419,1015.45 2489.87,1086.32 2517.43,1086.32 v3(2556.8,1125.69)
  Bottom Layer w5: U7.G9@2155.22,1109.94 2237.9,1027.26 v3(2237.9,1011.52) ; v3(2556.8,1125.69) U9.G9@2572.55,1109.94
NSDRAM_RAS: U5.107 U7.F8 U9.F8 | length 1434.7
  Top Layer w5: v3(2537.11,1779.23) U5.107@2584.36,1779.23
  Mid-Layer 1 w5: v3(2474.12,1098.13) 2493.81,1098.13 2517.43,1121.75 2517.43,1191.01 2585.85,1259.44 2585.85,1730.49 v3(2537.11,1779.23)
  Mid-Layer 2 w5: v3(2048.93,1070.57) 2060.42,1082.07 2080.11,1082.07 2089.48,1091.44 2203.65,1091.44 2235.15,1122.93 2348.87,1122.93 2379.74,1092.07 2432.63,1092.07 2438.69,1098.13 v3(2474.12,1098.13)
  Bottom Layer w5: v3(2048.93,1070.57) 2072.55,1094.19 2107.98,1094.19 U7.F8@2123.73,1078.44 ; v3(2474.12,1098.13) 2501.34,1098.13 2505.27,1094.19 2525.3,1094.19 U9.F8@2541.05,1078.44
NSDRAM_WE: U5.106 U7.F9 U9.F9 | length 1297.4
  Top Layer w5: U5.106@2584.36,1763.48 2619.79,1763.48 v3(2631.6,1775.3)
  Mid-Layer 1 w5: v3(2556.8,1094.19) 2541.05,1109.94 2541.05,1184.74 2605.85,1249.55 2605.85,1749.55 v3(2631.6,1775.3)
  Mid-Layer 2 w5: v3(2222.15,991.83) 2230.03,983.96 2415.07,983.96 2478.06,1046.95 2509.56,1046.95 v3(2556.8,1094.19)
  Bottom Layer w5: U7.F9@2155.22,1078.44 2206.41,1027.26 2206.41,1007.58 v3(2222.15,991.83) ; v3(2556.8,1094.19) U9.F9@2572.55,1078.44
NTRST: P2.3 R57.1 U5.174 | length 1796.4
  Top Layer w5: U5.174@1859.95,2251.67 1859.95,2220.18 1863.89,2216.24 v3(1863.89,2204.43)
  Mid-Layer 2 w5: v1(2111.92,2747.74) 2163.1,2798.92 2261.52,2798.92 2391.45,2928.84 2391.45,3576.87 P2.3@2343.81,3624.51
  Mid-Layer 3 w5: v3(1863.89,2204.43) 1863.89,2294.98 2104.04,2535.14 2104.04,2684.74 2111.92,2692.62 v1(2111.92,2747.74)
  Bottom Layer w5: v1(2111.92,2747.74) R57.1@2111.92,2779.23
NWAIT: U1.G22 U5.144
NWE: U1.M20 U5.39 U8.C5 | length 27.8
  Top Layer w5: U1.M20@1072.55,1401.28 v1(1092.23,1381.59)
PP_CTRL.NRESETIN: P2.15 R24.1 U1.A14 U5.96
PRO_P.SSPCLK: U1.E20 U5.165 | length 27.8
  Top Layer w5: U1.E20@1072.55,1676.87 v1(1092.23,1696.56)
PRO_P.SSPEN: U1.D21 U5.166
PRO_P.SSPFRM: U1.G17 U5.164 | length 27.8
  Top Layer w5: U1.G17@954.44,1598.13 v1(974.12,1617.82)
PRO_P.SSPRX_UART2RX: U1.E19 U5.169 | length 27.8
  Top Layer w5: U1.E19@1033.18,1676.87 v1(1052.86,1696.56)
PRO_P.SSPTX_UART2TX: U1.F12 U5.167 | length 27.8
  Top Layer w5: U1.F12@757.59,1637.5 v1(777.27,1657.19)
PROCESSOR_TDI: R1.2 U1.B22 U6.3 U6.5
PROCESSOR_TDO: R6.1 U6.4 | length 544.8
  Top Layer w5: R6.1@1844.2,2478.05 1901.29,2478.05 2131.6,2708.37 2186.72,2708.37 v1(2226.09,2747.74) U6.4@2226.09,2798.92
RAM0_DATA0: HDR2.42 U1.V12 | length 27.8
  Top Layer w5: U1.V12@757.59,1165.06 v1(777.27,1145.37)
RAM0_DATA1: HDR2.40 U1.U11 | length 27.8
  Top Layer w5: v1(698.53,1184.74) U1.U11@718.22,1204.43
RAM0_DATA2: HDR2.38 U1.AA13
RAM0_DATA3: HDR2.36 U1.AB13
RAM0_DATA4: HDR2.34 U1.AA12
RAM0_DATA5: HDR2.32 U1.V10 | length 27.8
  Top Layer w5: v1(659.16,1145.37) U1.V10@678.85,1165.06
RAM0_DATA6: HDR2.30 U1.AB12
RAM0_DATA7: HDR2.28 U1.V9 | length 27.8
  Top Layer w5: v1(619.79,1145.37) U1.V9@639.48,1165.06
RAM0_OE: HDR1.41 U1.F11 | length 27.8
  Top Layer w5: v1(698.53,1657.19) U1.F11@718.22,1637.5
RAM0_WE: HDR1.79 U1.F18 | length 27.8
  Top Layer w5: U1.F18@993.81,1637.5 v1(1013.49,1657.19)
RAM1_DATA0: HDR1.45 U1.F7 | length 27.8
  Top Layer w5: v1(541.05,1657.19) U1.F7@560.74,1637.5
RAM1_DATA1: HDR1.49 U1.E14 | length 43.6
  Top Layer w5: U1.E14@836.33,1676.87 v1(856.01,1696.56)
  Bottom Layer w5: 1348.14,2342.22 HDR1.49@1348.14,2357.97
RAM1_DATA2: HDR1.53 U1.D15 | length 27.8
  Top Layer w5: U1.D15@875.7,1716.24 v1(895.38,1735.93)
RAM1_DATA3: HDR1.57 U1.B17
RAM1_DATA4: HDR1.55 U1.C16 | length 68.8
  Top Layer w5: U1.C16@915.07,1755.61 v1(934.75,1775.3)
  Bottom Layer w5: HDR1.55@1438.69,2381.59 1442.63,2377.66 1442.63,2342.22
RAM1_DATA5: HDR1.51 U1.E13 | length 27.8
  Top Layer w5: U1.E13@796.96,1676.87 v1(816.64,1696.56)
RAM1_DATA6: HDR1.47 U1.B14
RAM1_DATA7: HDR1.43 U1.D12 | length 27.8
  Top Layer w5: U1.D12@757.59,1716.24 v1(777.27,1735.93)
RAM1_OE: HDR1.39 U1.C12 | length 27.8
  Top Layer w5: U1.C12@757.59,1755.61 v1(777.27,1775.3)
RAM1_WE: HDR1.61 U1.F14 | length 27.8
  Top Layer w5: U1.F14@836.33,1637.5 v1(856.01,1657.19)
RAM_ADDR0: HDR1.21 U1.J4 | length 27.8
  Top Layer w5: v1(422.94,1539.08) U1.J4@442.63,1519.39
RAM_ADDR1: HDR1.25 U1.E7 | length 27.8
  Top Layer w5: v1(541.05,1696.56) U1.E7@560.74,1676.87
RAM_ADDR2: HDR1.29 U1.E8 | length 27.8
  Top Layer w5: v1(580.42,1696.56) U1.E8@600.11,1676.87
RAM_ADDR3: HDR1.33 U1.C10 | length 27.8
  Top Layer w5: v1(659.16,1775.3) U1.C10@678.85,1755.61
RAM_ADDR4: HDR1.65 U1.C18 | length 27.8
  Top Layer w5: U1.C18@993.81,1755.61 v1(1013.49,1775.3)
RAM_ADDR5: HDR1.69 U1.E17 | length 59.3
  Top Layer w5: U1.E17@954.44,1676.87 v1(974.12,1696.56)
  Bottom Layer w5: HDR1.69@1659.16,2350.1 HDR1.69@1659.16,2381.59
RAM_ADDR6: HDR1.73 U1.D19 | length 46.8
  Top Layer w5: U1.D19@1033.18,1716.24 v1(1052.86,1735.93)
  Bottom Layer w5: HDR1.73@1714.28,2365.85 1722.15,2373.72 HDR1.73@1722.15,2381.59
RAM_ADDR7: HDR1.77 U1.E18 | length 27.8
  Top Layer w5: U1.E18@993.81,1676.87 v1(1013.49,1696.56)
RAM_ADDR8: HDR1.75 U1.F17 | length 39.7
  Top Layer w5: U1.F17@954.44,1637.5 v1(974.12,1657.19)
  Bottom Layer w5: 1745.78,2342.22 HDR1.75@1745.78,2354.04
RAM_ADDR9: HDR1.71 U1.D18 | length 27.8
  Top Layer w5: U1.D18@993.81,1716.24 v1(1013.49,1735.93)
RAM_ADDR10: HDR1.67 U1.E16 | length 27.8
  Top Layer w5: U1.E16@915.07,1676.87 v1(934.75,1696.56)
RAM_ADDR11: HDR1.63 U1.E15 | length 70.5
  Top Layer w5: U1.E15@875.7,1676.87 v1(895.38,1696.56)
  Bottom Layer w5: 1556.8,2342.22 1556.8,2373.72 HDR1.63@1564.67,2381.59
RAM_ADDR12: HDR1.59 U1.A18
RAM_ADDR13: HDR1.35 U1.E9 | length 27.8
  Top Layer w5: v1(619.79,1696.56) U1.E9@639.48,1676.87
RAM_ADDR14: HDR1.31 U1.D8 | length 27.8
  Top Layer w5: v1(580.42,1735.93) U1.D8@600.11,1716.24
RAM_ADDR15: HDR1.27 U1.G6 | length 27.8
  Top Layer w5: v1(501.68,1617.82) U1.G6@521.37,1598.13
RAM_ADDR16: HDR1.23 U1.H5 | length 27.8
  Top Layer w5: v1(462.31,1578.45) U1.H5@482,1558.76
RAM_CS: HDR1.37 U1.E10 | length 27.8
  Top Layer w5: v1(659.16,1696.56) U1.E10@678.85,1676.87
RED0: HDR1.6 U1.E1
RED1: HDR1.8 U1.C2
REF_CLK: HDR2.4 U1.Y4 | length 27.8
  Top Layer w5: v1(422.94,1066.63) U1.Y4@442.63,1086.32
SCL: HDR2.5 U1.Y3 | length 27.8
  Top Layer w5: v1(383.57,1066.63) U1.Y3@403.26,1086.32
SDA: HDR2.3 U1.Y2
SDRAM_CKE: U5.102 U7.F3 U9.F3 | length 1319.2
  Top Layer w5: v3(2537.11,1700.49) U5.102@2584.36,1700.49
  Mid-Layer 1 w5: v3(2403.26,1066.63) 2444.94,1108.32 2444.94,1143.75 2466.25,1165.06 2466.25,1231.99 2565.85,1331.59 2565.85,1671.75 v3(2537.11,1700.49)
  Mid-Layer 2 w5: v3(1950.5,1031.2) 1966.25,1015.45 2186.72,1015.45 2218.22,1046.95 2383.57,1046.95 v3(2403.26,1066.63)
  Bottom Layer w5: v3(1950.5,1031.2) 1950.5,1062.7 U7.F3@1966.25,1078.44 ; U9.F3@2383.57,1078.44 2391.45,1078.44 v3(2403.26,1066.63)
SDRAM_CLK: U5.101 U7.F2 U9.F2 | length 1271.3
  Top Layer w5: v3(2537.11,1669) 2537.11,1676.87 2544.99,1684.74 U5.101@2584.36,1684.74
  Mid-Layer 1 w5: v3(2367.82,1062.7) 2367.82,1109.94 2391.45,1133.56 2420.61,1133.56 2456.25,1169.2 2456.25,1236.13 2555.85,1335.74 2555.85,1650.26 v3(2537.11,1669)
  Mid-Layer 2 w5: v3(1989.87,1070.57) 2013.49,1046.95 2194.59,1046.95 2226.09,1078.44 2352.08,1078.44 v3(2367.82,1062.7)
  Bottom Layer w5: U7.F2@1934.75,1078.44 1950.5,1094.19 1974.12,1094.19 v3(1989.87,1070.57) ; U9.F2@2352.08,1078.44 v3(2367.82,1062.7)
SDRAM_DQM0: U5.112 U9.E8 | length 946.4
  Top Layer w5: U5.112@2584.36,1857.97 2619.79,1857.97 v3(2631.6,1846.16)
  Mid-Layer 1 w5: v3(2493.81,1062.7) 2529.24,1098.13 2529.24,1188.68 2595.85,1255.3 2595.85,1810.41 v3(2631.6,1846.16)
  Bottom Layer w5: v3(2493.81,1062.7) 2525.3,1062.7 U9.E8@2541.05,1046.95
SDRAM_DQM1: U5.111 U9.F1 | length 945.5
  Top Layer w5: v3(2537.11,1842.22) U5.111@2584.36,1842.22
  Mid-Layer 1 w5: v3(2336.33,1094.19) 2387.51,1145.37 2418.28,1145.37 2442.63,1169.72 2442.63,1236.65 2545.85,1339.88 2545.85,1550.02 2513.49,1582.38 2513.49,1779.23 2537.11,1802.85 v3(2537.11,1842.22)
  Bottom Layer w5: U9.F1@2320.58,1078.44 v3(2336.33,1094.19)
SDRAM_DQM2: U5.110 U7.E8 | length 1356.2
  Top Layer w5: v3(2064.67,1342.22) 2076.48,1330.41 2076.48,1180.81 2092.23,1165.06 2092.23,1078.44 v3(2107.98,1062.7) ; v3(2521.37,1822.54) 2537.11,1822.54 2541.05,1826.48 U5.110@2584.36,1826.48
  Mid-Layer 1 w5: v3(2513.49,1334.35) 2535.85,1356.71 2535.85,1544.27 2501.68,1578.44 2501.68,1781.56 2521.37,1801.25 v3(2521.37,1822.54)
  Mid-Layer 2 w5: v3(2064.67,1342.22) 2371.76,1342.22 2379.63,1334.35 v3(2513.49,1334.35)
  Bottom Layer w5: v3(2107.98,1062.7) U7.E8@2123.73,1046.95
SDRAM_DQM3: U5.109 U7.F1 | length 1355.8
  Top Layer w5: v3(1919,1094.19) 1934.75,1109.94 1934.75,1204.43 1985.93,1255.61 v3(1985.93,1287.11) ; v3(2493.81,1802.85) 2521.37,1802.85 2525.3,1806.79 2537.11,1806.79 2541.05,1810.73 U5.109@2584.36,1810.73
  Mid-Layer 1 w5: v3(2493.81,1802.85) 2489.87,1794.98 2489.87,1574.51 2525.85,1538.52 2525.85,1382.15 v3(2497.74,1354.04)
  Mid-Layer 2 w5: v3(1985.93,1287.11) 2056.8,1357.97 2450.5,1357.97 2454.44,1354.04 v3(2497.74,1354.04)
  Bottom Layer w5: U7.F1@1903.26,1078.44 v3(1919,1094.19)
SP0: HDR2.79 U1.AA19
SP1: HDR2.81 U1.Y18 | length 27.8
  Top Layer w5: U1.Y18@993.81,1086.32 v1(1013.49,1066.63)
SP2: HDR2.83 U1.V16 | length 27.8
  Top Layer w5: U1.V16@915.07,1165.06 v1(934.75,1145.37)
SP3: HDR2.85 U1.W18 | length 27.8
  Top Layer w5: U1.W18@993.81,1125.69 v1(1013.49,1106)
SP4: HDR2.87 U1.Y20 | length 27.8
  Top Layer w5: U1.Y20@1072.55,1086.32 v1(1092.23,1066.63)
SP5: HDR2.89 U1.U17 | length 27.8
  Top Layer w5: U1.U17@954.44,1204.43 v1(974.12,1184.74)
SP6: HDR2.91 U1.V18 | length 27.8
  Top Layer w5: U1.V18@993.81,1165.06 v1(1013.49,1145.37)
SP7: HDR2.90 U1.U20 | length 27.8
  Top Layer w5: U1.U20@1072.55,1204.43 v1(1092.23,1184.74)
SP8: HDR2.92 U1.V22
SP9: HDR2.88 U1.V21
SP10: HDR2.86 U1.W22
SP11: HDR2.84 U1.U19 | length 27.8
  Top Layer w5: U1.U19@1033.18,1204.43 v1(1052.86,1184.74)
SP12: HDR2.82 U1.V20 | length 27.8
  Top Layer w5: U1.V20@1072.55,1165.06 v1(1092.23,1145.37)
SP13: HDR2.80 U1.W21
SP14: HDR2.78 U1.U18 | length 27.8
  Top Layer w5: U1.U18@993.81,1204.43 v1(1013.49,1184.74)
SP15: HDR2.76 U1.Y22
SPI_CLK: HDR1.46 U1.A11
SPI_DIN: HDR1.44 U1.D9 | length 27.8
  Top Layer w5: v1(619.79,1735.93) U1.D9@639.48,1716.24
SPI_DOUT: HDR1.50 U1.D10 | length 27.8
  Top Layer w5: v1(659.16,1735.93) U1.D10@678.85,1716.24
SPI_MODE: HDR1.52 U1.E11 | length 27.8
  Top Layer w5: v1(698.53,1696.56) U1.E11@718.22,1676.87
SPI_SEL: HDR1.48 U1.C11 | length 27.8
  Top Layer w5: v1(698.53,1775.3) U1.C11@718.22,1755.61
SRAM0_A0: U1.A8 U3.1 | length 4.9
  Top Layer w5: U3.1@922.94,2365.85 U3.1@922.94,2370.77
SRAM0_A1: U1.H4 U3.2 | length 62.3
  Top Layer w5: v1(422.94,1578.45) U1.H4@442.63,1558.76 ; 954.44,2336.32 U3.2@954.44,2370.77
SRAM0_A2: U1.F6 U3.3 | length 62.3
  Top Layer w5: v1(501.68,1657.19) U1.F6@521.37,1637.5 ; 985.93,2336.32 U3.3@985.93,2370.77
SRAM0_A3: U1.A9 U3.4 | length 34.4
  Top Layer w5: 1017.43,2336.32 U3.4@1017.43,2370.77
SRAM0_A4: U1.A10 U3.5 | length 34.4
  Top Layer w5: 1048.93,2336.32 U3.5@1048.93,2370.77
SRAM0_A5: U1.C17 U3.18 | length 27.8
  Top Layer w5: U1.C17@954.44,1755.61 v1(974.12,1775.3)
SRAM0_A6: U1.B18 U3.19
SRAM0_A7: U1.A19 U3.20
SRAM0_A8: U1.D17 U3.21 | length 27.8
  Top Layer w5: U1.D17@954.44,1716.24 v1(974.12,1735.93)
SRAM0_A9: U1.B19 U3.22
SRAM0_A10: U1.C13 U3.23 | length 27.8
  Top Layer w5: U1.C13@796.96,1755.61 v1(816.64,1775.3)
SRAM0_A11: U1.B13 U3.24
SRAM0_A12: U1.F10 U3.25 | length 27.8
  Top Layer w5: v1(659.16,1657.19) U1.F10@678.85,1637.5
SRAM0_A13: U1.D11 U3.26 | length 27.8
  Top Layer w5: v1(698.53,1735.93) U1.D11@718.22,1716.24
SRAM0_A14: U1.F9 U3.27 | length 27.8
  Top Layer w5: v1(619.79,1657.19) U1.F9@639.48,1637.5
SRAM0_A15: U1.A5 U3.42
SRAM0_A16: U1.F2 U3.43 | length 18.7
  Top Layer w5: U3.43@954.44,2791.04 U3.43@954.44,2809.74
SRAM0_A17: U1.D2 U3.44
SRAM0_A18: U1.B11 U3.28
SRAM0_D0: U1.J6 U3.7 | length 27.8
  Top Layer w5: v1(501.68,1539.08) U1.J6@521.37,1519.39
SRAM0_D1: U1.A12 U3.8
SRAM0_D2: U1.B12 U3.9
SRAM0_D3: U1.A13 U3.10
SRAM0_D4: U1.A15 U3.13
SRAM0_D5: U1.D13 U3.14 | length 27.8
  Top Layer w5: U1.D13@796.96,1716.24 v1(816.64,1735.93)
SRAM0_D6: U1.A16 U3.15
SRAM0_D7: U1.D14 U3.16 | length 27.8
  Top Layer w5: U1.D14@836.33,1716.24 v1(856.01,1735.93)
SRAM0_D8: U1.B9 U3.29
SRAM0_D9: U1.B8 U3.30
SRAM0_D10: U1.D7 U3.31 | length 27.8
  Top Layer w5: v1(541.05,1735.93) U1.D7@560.74,1716.24
SRAM0_D11: U1.E6 U3.32 | length 27.8
  Top Layer w5: v1(501.68,1696.56) U1.E6@521.37,1676.87
SRAM0_D12: U1.B7 U3.35
SRAM0_D13: U1.C7 U3.36 | length 27.8
  Top Layer w5: v1(541.05,1775.3) U1.C7@560.74,1755.61
SRAM0_D14: U1.A7 U3.37
SRAM0_D15: U1.B6 U3.38
SRAM0_E: U1.B10 U3.6
SRAM0_LB: U1.F5 U3.39 | length 27.8
  Top Layer w5: v1(462.31,1657.19) U1.F5@482,1637.5
SRAM0_OE: U1.B5 U3.41
SRAM0_UB: U1.E5 U3.40 | length 27.8
  Top Layer w5: v1(462.31,1696.56) U1.E5@482,1676.87
SRAM0_W: U1.B16 U3.17
SRAM1_A0: U1.H1 U4.1 | length 1509.4
  Top Layer w5: 239.71,1302.85 146.41,1209.55 146.41,904.76 391.85,659.32 480.01,571.15 761.16,290 867.88,290 922.94,234.94 U4.1@922.94,216.24
SRAM1_A1: R19.2 U1.J1 U4.2 | length 1515.3
  Top Layer w5: 243.88,1292.06 156.41,1204.58 156.41,908.9 765.31,300 889.38,300 954.44,234.94 U4.2@954.44,216.24
SRAM1_A2: U1.K1 U4.3 | length 1523.9
  Top Layer w5: 250,1283.17 166.41,1199.57 166.41,913.04 405.99,673.46 500.01,579.44 769.45,310 910.87,310 985.93,234.94 U4.3@985.93,216.24
SRAM1_A3: U1.K2 U4.4 | length 1528.5
  Top Layer w5: 253.65,1271.36 176.41,1194.11 176.41,917.18 179.45,914.14 180,913.59 415.99,677.6 773.59,320 932.37,320 1017.43,234.94 U4.4@1017.43,216.24
SRAM1_A4: U1.L1 U4.5 | length 1538.2
  Top Layer w5: 260,1263.48 186.41,1189.89 186.41,921.33 189.45,918.28 190,917.73 420.13,687.6 520.01,587.72 777.63,330.1 953.77,330.1 1048.93,234.94 U4.5@1048.93,216.24
SRAM1_A5: U1.AA3 U4.18 | length 1416.6
  Top Layer w5: 463.06,960 463.06,859.42 520.71,801.77 521.23,801.77 599.25,723.75 599.44,723.75 621.93,701.27 621.93,627.22 817.61,431.54 1261.77,431.54 1458.37,234.94 U4.18@1458.37,216.24
SRAM1_A6: U1.V2 U4.19 | length 1434.5
  Top Layer w5: 475.93,960 475.93,860.69 524.85,811.77 525.57,811.77 631.93,705.41 631.93,631.37 821.75,441.54 1283.27,441.54 1489.87,234.94 U4.19@1489.87,216.24
SRAM1_A7: U1.AA4 U4.20 | length 1452.4
  Top Layer w5: 488.81,960 488.81,861.96 529,821.77 529.71,821.77 641.93,709.55 641.93,635.51 825.89,451.54 1304.76,451.54 1521.37,234.94 U4.20@1521.37,216.24
SRAM1_A8: U1.U2 U4.21 | length 1470.3
  Top Layer w5: 501.68,960 501.68,863.23 533.14,831.77 533.85,831.77 651.93,713.69 651.93,639.65 830.04,461.54 1326.26,461.54 1552.86,234.94 U4.21@1552.86,216.24
SRAM1_A9: U1.W5 U4.22 | length 1494.6
  Top Layer w5: v1(462.31,1106) U1.W5@482,1125.69 ; 565.31,960 565.31,814.46 661.93,717.83 661.93,643.79 834.18,471.54 1347.75,471.54 1584.36,234.94 U4.22@1584.36,216.24
SRAM1_A10: U1.T2 U4.23 | length 1416.3
  Top Layer w5: 585.33,960 585.33,808.58 671.93,721.98 671.93,647.93 838.32,481.54 1419.54,481.54 1584.36,646.36 U4.23@1584.36,665.06
SRAM1_A11: U1.AA6 U4.24 | length 1362.9
  Top Layer w5: 598.2,960 598.2,809.85 681.93,726.12 681.93,652.08 842.46,491.54 1398.05,491.54 1552.86,646.36 U4.24@1552.86,665.06
SRAM1_A12: U1.AB7 U4.25 | length 1309.5
  Top Layer w5: 611.08,960 611.08,811.11 691.93,730.26 691.93,656.22 846.6,501.54 1376.55,501.54 1521.37,646.36 U4.25@1521.37,665.06
SRAM1_A13: U1.U3 U4.26 | length 1283.9
  Top Layer w5: v1(383.57,1184.74) U1.U3@403.26,1204.43 ; 623.95,960 623.95,812.38 701.93,734.4 701.93,660.36 850.75,511.54 1355.06,511.54 1489.87,646.36 U4.26@1489.87,665.06
SRAM1_A14: U1.W6 U4.27 | length 1230.5
  Top Layer w5: v1(501.68,1106) U1.W6@521.37,1125.69 ; 636.82,960 636.82,813.65 711.93,738.54 711.93,664.5 854.89,521.54 1333.56,521.54 1458.37,646.36 U4.27@1458.37,665.06
SRAM1_A15: U1.Y10 U4.42 | length 345.5
  Top Layer w5: v1(659.16,1066.63) U1.Y10@678.85,1086.32 ; 855.95,928.84 855.95,812.8 985.93,682.82 U4.42@985.93,665.06
SRAM1_A16: U1.AA10 U4.43 | length 308.7
  Top Layer w5: 845.95,928.84 845.95,808.1 954.44,699.62 U4.43@954.44,665.06
SRAM1_A17: U1.W9 U4.44 | length 391.3
  Top Layer w5: v1(619.79,1106) U1.W9@639.48,1125.69 ; 757.59,960 757.59,916.78 835.95,838.41 835.95,803.96 922.94,716.97 U4.44@922.94,665.06
SRAM1_A18: U1.U4 U4.28 | length 1177.1
  Top Layer w5: v1(422.94,1184.74) U1.U4@442.63,1204.43 ; 649.7,960 649.7,814.92 721.93,742.69 721.93,668.65 859.03,531.54 1312.06,531.54 1426.88,646.36 U4.28@1426.88,665.06
SRAM1_D0: U1.P1 U4.7 | length 1552
  Top Layer w5: 272.35,1242.35 206.41,1176.41 206.41,929.61 434.27,701.74 540.01,596 785.92,350.1 996.76,350.1 1111.92,234.94 U4.7@1111.92,216.24
SRAM1_D1: U1.N1 U4.8 | length 1512.6
  Top Layer w5: 251.57,1196.63 216.41,1161.46 216.41,933.75 788.61,361.54 1016.81,361.54 1143.41,234.94 U4.8@1143.41,216.24
SRAM1_D2: U1.R1 U4.9 | length 1421.3
  Top Layer w5: 258.21,1090 229.22,1061.02 229.22,935.08 448.42,715.88 560.01,604.29 792.76,371.54 1038.31,371.54 1174.91,234.94 U4.9@1174.91,216.24
SRAM1_D3: U1.AB8 U4.10
SRAM1_D4: U1.T1 U4.13 | length 1514.4
  Top Layer w5: 262.35,1072.35 239.71,1049.71 239.71,938.73 240,938.44 796.9,381.54 1154.29,381.54 1300.89,234.94 U4.13@1300.89,216.24
SRAM1_D5: U1.R2 U4.14 | length 1525.2
  Top Layer w5: 269.42,1065.28 249.71,1045.57 249.71,942.87 462.56,730.03 508.83,683.75 801.04,391.54 1175.79,391.54 1332.39,234.94 U4.14@1332.39,216.24
SRAM1_D6: U1.V1 U4.15 | length 1532.6
  Top Layer w5: 277,1058.71 264.7,1046.41 264.7,942.03 472.56,734.17 805.18,401.54 1197.28,401.54 1363.89,234.94 U4.15@1363.89,216.24
SRAM1_D7: U1.W1 U4.16 | length 1544.9
  Top Layer w5: 285.15,1052.73 274.7,1042.27 274.7,946.17 476.7,744.17 517.12,703.75 809.32,411.54 1218.78,411.54 1395.38,234.94 U4.16@1395.38,216.24
SRAM1_D8: U1.T5 U4.29 | length 1123.7
  Top Layer w5: v1(462.31,1224.11) U1.T5@482,1243.8 ; 662.57,960 662.57,816.19 731.93,746.83 731.93,672.79 863.17,541.54 1290.57,541.54 1395.38,646.36 U4.29@1395.38,665.06